# Altium PCB zulu_a7_hdi_optimized.PcbDoc (part 4 of 4)
Units mm, origin at the board's own origin, x right, y up, seen from the top; angles counter-clockwise.
Board outline 69.85 x 25.4 mm, 6 copper layers (Top Layer, L2-GND, L3-SIG, L4-SIG, L5-VCC3V3, Bottom Layer), stack 1.65 mm thick; 178 components, 177 nets, 839 pads, 1771 vias.
Unrouted connection lines stored in the file: 143.
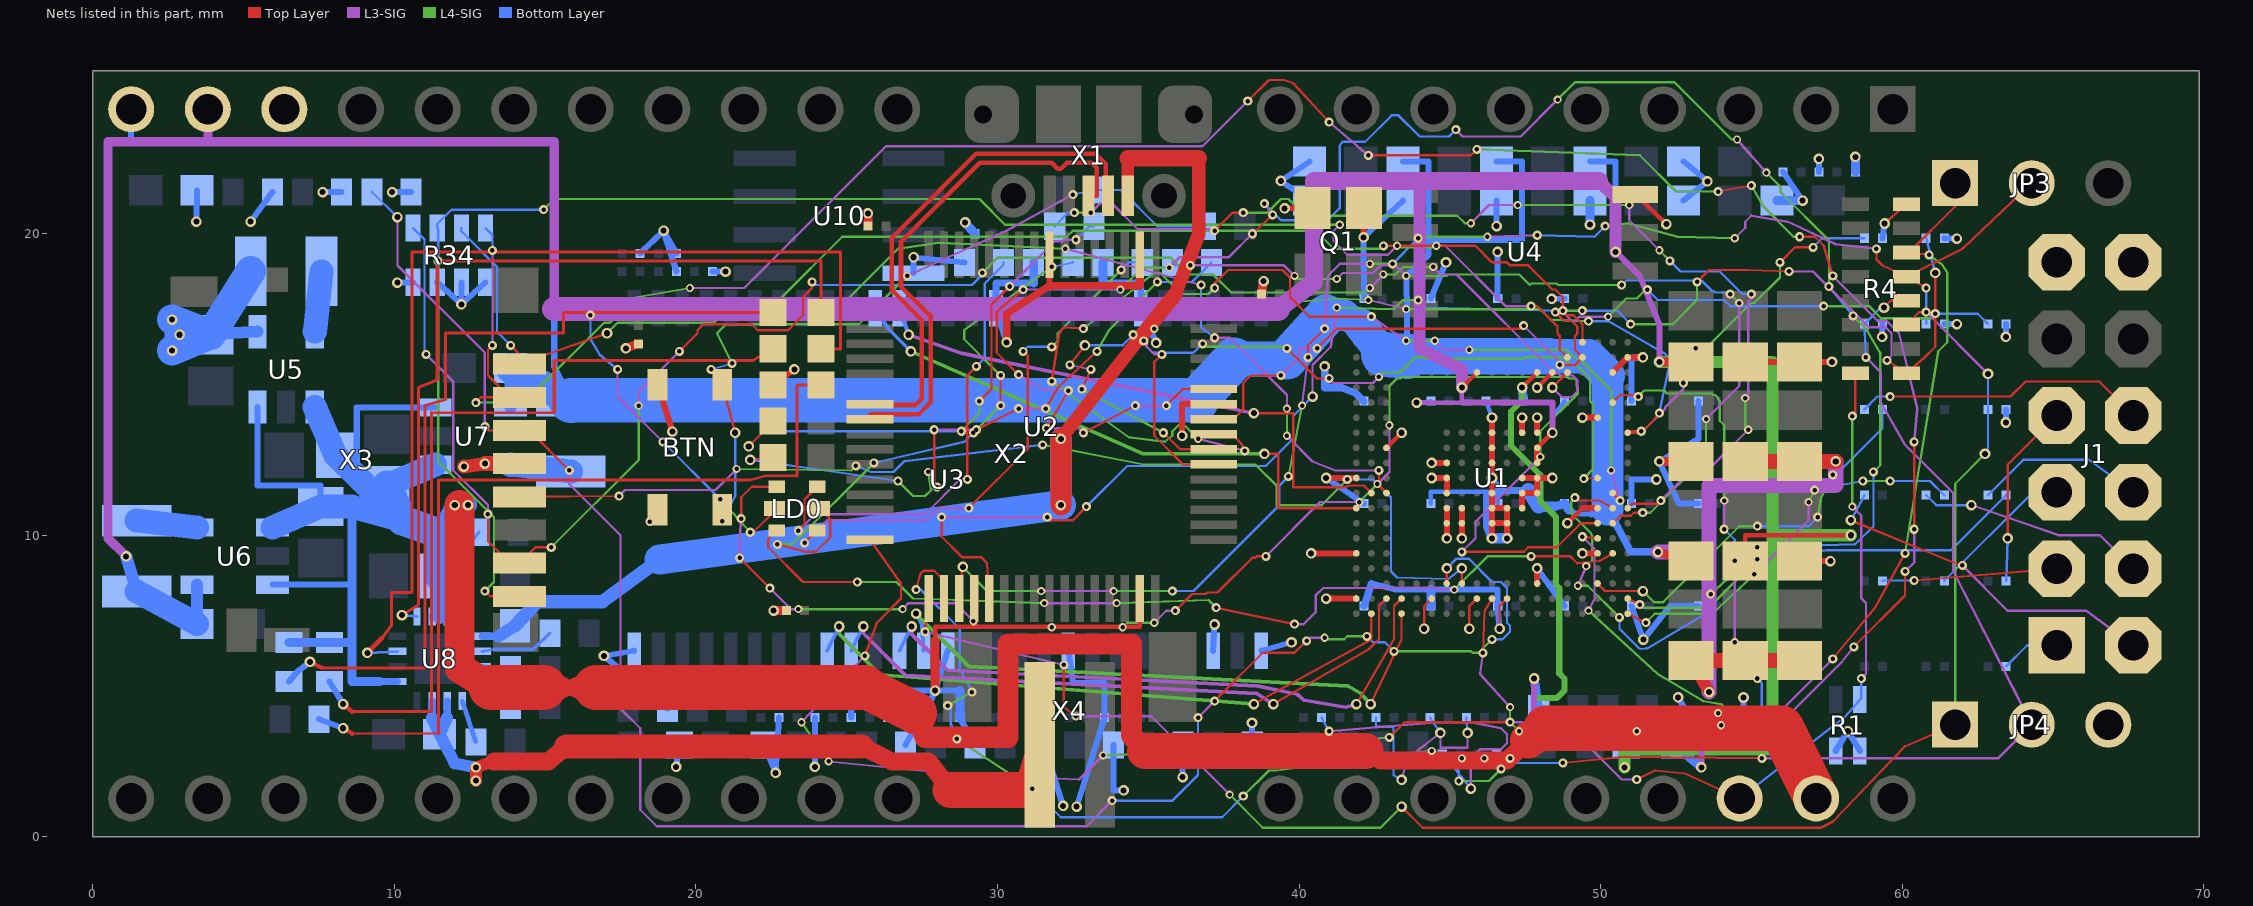
[diagram p7: the nets of this part, all layers, seen from the top]

## Via types
v1: diameter 0.35, hole 0.2, Top Layer to Bottom Layer, tented both sides, 392 vias
v2: diameter 0.27, hole 0.15, L3-SIG to L4-SIG, tented both sides, 363 vias
v3: diameter 0.3, hole 0.15, Top Layer to L2-GND, tented both sides, 292 vias
v4: diameter 0.3, hole 0.15, L2-GND to L3-SIG, tented both sides, 279 vias
v5: diameter 0.3, hole 0.15, L4-SIG to L5-VCC3V3, tented both sides, 223 vias
v6: diameter 0.3, hole 0.15, L5-VCC3V3 to Bottom Layer, tented both sides, 222 vias

## Nets (pads, with @x,y where several pads share a name; then routed paths per layer and width w, separated by ;. In a path a pad name is that pad's centre, name@x,y a point inside that pad or via, vN(x,y) a via of type N, cw(c..) or ccw(c..) an arc to the next point about the centre after c; other vN are vias at no path point) (continued)
JA8: R31.2 U1.W19 | length 13
  Top Layer w0.076: U1.W19@50.9,7.4 v3(51.5,7.1)
  L3-SIG w0.076: v2(55.1,8.7) 56.9,10.5 v2(56.9,11.1)
  L4-SIG w0.076: v3(51.5,7.1) 51.8,7.4 53.7,7.4 v2(55.1,8.7) ; v2(56.9,11.1) v5(57.1,11.5) ; v5(58.7,11.8) v5(59.6,11.8)
  Bottom Layer w0.076: v5(57.1,11.5) v5(58.7,11.8) ; v5(59.6,11.8) 60.93,11.8 R31.2@61.4,11.33
  other v2: 51.5,7.1
  other v4: 51.5,7.1
  other v6: 57.1,11.5 58.7,11.8 59.6,11.8
JA9: R32.2 U1.V19 | length 14.1
  Top Layer w0.076: U1.V19@50.9,7.9 v3(51.3,7.7)
  L4-SIG w0.076: v3(51.3,7.7) 51.4,7.6 53.6,7.6 v5(55.2,9.2)
  Bottom Layer w0.076: v5(55.2,9.2) 57.5,9.5 61.62,9.5 R32.2@63.45,11.33
  other v2: 51.3,7.7
  other v4: 51.3,7.7
  other v6: 55.2,9.2
JA10: R33.2 U1.U17 | length 13.1
  Top Layer w0.076: U1.U17@49.9,8.4 50.15,8.15 v1(51.4,8.15)
  L4-SIG w0.076: v1(51.4,8.15) 51.775,7.775 52.075,7.775 54.6,10.3 v5(55.2,10.3) ; v5(57.2,10.6) 57.3,11.2 v5(57.7,12)
  Bottom Layer w0.076: v5(55.2,10.3) 56.9,10.3 v5(57.2,10.6) ; v5(57.7,12) 57.9,12.1 59.35,13.55 R33.2@59.35,14.17
  other v6: 55.2,10.3 57.2,10.6 57.7,12
LD5_K: LD5.K R78.2 | length 28.2
  Top Layer w0.076: 8.6,3.425 11.455,3.425 ; 21.8,11.825 22.3,11.973 23.35,11.973
  Top Layer w0.1: 11.455,3.425 11.455,11.825 21.8,11.825 ; 23.35,11.973 23.35,14.985 LD5.K@24.15,14.985
  Top Layer w0.15: v1(8.3,3.6) 8.6,3.425
  Bottom Layer w0.2: R78.2@7.5,3.9 v1(8.3,3.6)
LDQM: U1.W4 U3.15 | length 20.6
  Top Layer w0.076: v1(42.375,4.4) 43.4,6.55 U1.W4@43.4,7.4
  L4-SIG w0.125: v1(27.3,7.4) 29.05,5.65 41.625,5 42.05,4.75 v1(42.375,4.4)
  Bottom Layer w0.125: v1(27.3,7.4) 27.5,7.025 U3.15@27.55,6.17
LED0_B: LD0.2 U1.N17 | length 49.6
  Top Layer w0.076: v3(21.45,9.25) v3(22.45,8.25) ; v3(21.5,10.55) 21.5,11.26 21.85,11.61 LD0.2@22.675,11.61 ; v3(35.9,7.5) 36.45,8.05 36.9,8.05 36.95,8.1 37.3,8.1 38.45,9.25 38.55,9.25 38.6,9.3 v3(38.9,9.3) ; v3(45.4,9.45) 47.45,9.45 47.6,9.6 48.55,9.6 49.35,10.4 U1.N17@49.9,10.4
  L3-SIG w0.076: v3(21.45,9.25) 21.45,9.95 v3(21.5,10.55) ; v3(22.45,8.25) 23.15,7.55 v2(23.4,7.55) ; v2(26.85,7.55) 27.05,7.75 28.6,7.75 v2(29.2,7.15) ; v2(31.8,6.95) v2(34.15,6.95) ; v2(35.2,7.1) 35.6,7.5 v3(35.9,7.5) ; v3(38.9,9.3) 40.7,11.1 v2(42,11.1) ; v2(42.6,11.7) 43,12.1 v2(43,13.65) ; v3(45.4,9.45) 45.85,9.9 45.85,10.45 v2(48,12.6)
  L4-SIG w0.076: v2(23.4,7.55) v2(26.85,7.55) ; v2(29.2,7.15) 29.4,6.95 v2(31.8,6.95) ; v2(34.15,6.95) 34.3,7.1 v2(35.2,7.1) ; v2(42,11.1) v2(42.6,11.7) ; v2(43,13.65) 43,14.95 43.25,15.2 43.35,15.2 43.4,15.25 48.9,15.25 48.95,15.2 49.15,15.2 49.2,15.15 49.2,14.95 49.25,14.9 49.25,14.7 48,13.45 v2(48,12.6)
  other v4: 35.9,7.5 22.45,8.25 21.45,9.25 38.9,9.3 45.4,9.45 21.5,10.55
LED0_G: LD0.6 U1.R18 | length 31
  Top Layer w0.076: LD0.6@22.675,10.16 22.4,9.885 22.4,9.6 23.55,8.45 v3(25.35,8.45) ; v3(37.25,7.6) v3(39.85,7.05) ; v3(47.7,9.3) 49,9.3 49.225,9.075 49.975,9.15 U1.R18@50.4,9.4
  L3-SIG w0.076: v2(31.55,7.75) v2(33.95,7.75) ; v3(39.85,7.05) 40.15,7.05 40.55,7.45 40.55,8 40.8,8.25 44.6,8.25 44.65,8.2 v2(45.15,8.2)
  L4-SIG w0.076: v3(25.35,8.45) 26.65,8.45 27.2,7.9 v2(31.55,7.75) ; v2(33.95,7.75) 37,7.85 v3(37.25,7.6) ; v2(45.15,8.2) 46.25,9.3 v3(47.7,9.3)
  other v2: 37.25,7.6 25.35,8.45 47.7,9.3
  other v4: 39.85,7.05 37.25,7.6 25.35,8.45 47.7,9.3
LED0_R: LD0.4 U1.P17 | length 87.3
  Top Layer w0.076: v3(21.8,10.1) 21.9,10.1 22.6,10.8 LD0.4@22.6,10.885 ; v3(38.3,24.4) 39,25.1 39.5,25.1 39.8,25 v3(41,23.7) ; v3(42.3,22.6) 45.7,22.6 v3(45.9,22.8) ; v3(49.4,9.95) U1.P17@49.9,9.9 ; v3(53.9,21.4) v3(55,21.6) ; v3(56.6,19.9) 57.1,19.9 57.4,19.6 v3(57.7,18.6) ; v3(58.4,6.3) 60.1,8 v3(60.1,8.8) ; v3(60.4,10.2) v3(60.4,13.1)
  L3-SIG w0.076: v2(17.4,15.5) 17.4,14.6 v2(18.9,13.1) ; v2(19.8,18.2) 21.6,18.2 26.3,22.9 36.8,22.9 v3(38.3,24.4) ; v3(41,23.7) v3(42.3,22.6) ; v3(49.4,9.95) 49.8,9.55 49.8,7.9 v2(49.6,7.5) ; v2(54,3.7) 55.9,3.7 58,5.8 v3(58.4,6.3) ; v3(57.7,18.6) 59.2,17.1 59.5,17.1 59.9,16.7 60.5,14.2 v3(60.4,13.1) ; v3(60.1,8.8) 60.4,9.1 v3(60.4,10.2)
  L4-SIG w0.076: v5(16.5,17.3) 17.5,17.8 v2(19.8,18.2) ; v5(20.8,11.2) v3(21.8,10.1) ; v3(45.9,22.8) 51.3,22.6 52.5,21.4 v3(53.9,21.4) ; v2(49.6,7.5) 51.9,5.4 53.4,4.5 54,4.4 54.2,4.2 54.2,4 v2(54,3.7) ; v3(55,21.6) 55.4,20.9 56.4,19.9 v3(56.6,19.9)
  Bottom Layer w0.076: v5(16.5,17.3) 16.5,16.5 16.8,16 v2(17.4,15.5) ; v2(18.9,13.1) v5(20.8,11.2)
  other v2: 49.4,9.95 21.8,10.1 56.6,19.9 53.9,21.4 55,21.6 45.9,22.8
  other v4: 58.4,6.3 60.1,8.8 49.4,9.95 21.8,10.1 60.4,10.2 60.4,13.1 57.7,18.6 56.6,19.9 53.9,21.4 55,21.6 42.3,22.6 45.9,22.8 41,23.7 38.3,24.4
  other v5: 18.9,13.1 17.4,15.5
  other v6: 20.8,11.2 18.9,13.1 17.4,15.5 16.5,17.3
LED1: R83.1 U1.N18 | length 29.5
  Top Layer w0.076: U1.N18@50.4,10.4 50.65,10.65 51,10.65 51.1,10.75 v3(51.4,10.75)
  L3-SIG w0.076: v2(36.4,18.95) 39.5,18.95 v2(39.85,18.6) ; v2(41.25,18.5) 41.45,18.7 42.45,18.7 42.7,18.95 43.2,18.95 v2(43.55,18.6) ; v2(53.5,13.85) 54.6,14.95 v2(54.6,17.7)
  L4-SIG w0.076: v2(39.85,18.6) 39.95,18.5 v2(41.25,18.5) ; v2(43.55,18.6) 44.9,18.6 44.95,18.65 47.3,18.65 47.65,18.3 47.7,18.35 48.55,18.35 48.6,18.3 v5(50.7,18.3) ; v3(51.4,10.75) 51.65,10.75 53.5,12.6 v2(53.5,13.85) ; v5(54.3,18) v2(54.6,17.7)
  Bottom Layer w0.076: R83.1@35.8,19.05 35.9,18.95 v2(36.4,18.95) ; v5(50.7,18.3) 50.85,18.45 53.35,18.45 53.7,18.1 53.75,18.1 53.8,18.05 54.25,18.05 v5(54.3,18)
  other v2: 51.4,10.75
  other v4: 51.4,10.75
  other v5: 36.4,18.95
  other v6: 54.3,18 50.7,18.3 36.4,18.95
LED2: R84.1 U1.M19 | length 36.1
  Top Layer w0.076: v3(37.2,20.1) 37.8,20.7 v3(38.15,20.7) ; U1.M19@50.9,10.9 51.05,11.05 52,11.05 v3(52,11.15)
  L3-SIG w0.076: v2(33.1,20.7) 33.4,21 33.8,21 34.65,20.15 37.15,20.15 v3(37.2,20.1) ; v2(45.7,20.35) 46.3,20.95 v2(47.25,20.95) ; v2(50.95,20.95) 50.95,20.45 v2(51.95,19.45) ; v3(52,11.15) 52.7,11.85 53,11.85 53.4,12.25 53.65,12.25 v2(54.9,13.5) ; v2(54.8,14.55) 54.9,14.65 54.9,17.75 55,17.85 v2(55,18)
  L4-SIG w0.076: v5(32.55,20.7) v2(33.1,20.7) ; v3(38.15,20.7) 38.95,20.7 39.4,21.15 39.65,21.15 40.2,20.6 45.25,20.6 45.5,20.35 v2(45.7,20.35) ; v2(47.25,20.95) v2(50.95,20.95) ; v2(51.95,19.45) v5(52.3,19.1) ; v2(54.8,14.55) 54.8,13.6 v2(54.9,13.5)
  Bottom Layer w0.076: R84.1@31.9,20.25 32.35,20.7 v5(32.55,20.7) ; v5(52.3,19.1) 52.65,18.75 53.95,18.75 54.7,18 v2(55,18)
  other v2: 38.15,20.7
  other v4: 52,11.15 37.2,20.1 38.15,20.7
  other v5: 55,18
  other v6: 55,18 52.3,19.1 32.55,20.7
N$BTN: BTN.3 BTN.4 R85.1 R86.2 | length 25.7
  Top Layer w0.076: v3(20.5,15.5) 20.875,14.995 v1(21.3,13.4) ; v3(20.875,10.47) BTN.3@20.875,10.845
  L3-SIG w0.076: v2(27,18.6) 30.3,20.1 v2(32.5,21.3)
  L4-SIG w0.076: v5(21.2,15.7) 20.7,16.7 21,17 25.4,17 v2(27,18.6)
  Bottom Layer w0.076: v3(20.5,15.5) v5(21.2,15.7) ; v3(20.875,10.47) 21.3,11.3 v1(21.3,13.4) ; v2(32.5,21.3) R86.2@33.2,21.45 34.1,21.45 35.3,20.25 R85.1@36.9,20.25
  other v2: 20.875,10.47 20.5,15.5
  other v4: 20.875,10.47 20.5,15.5
  other v5: 20.875,10.47 20.5,15.5 32.5,21.3
  other v6: 20.875,10.47 20.5,15.5 21.2,15.7 32.5,21.3
N$LD0B: LD0.1 R80.2 | length 15.7
  Top Layer w0.076: v3(23.4,10.15) 23.6,10.35 23.6,11.185 LD0.1@24.025,11.61 ; v3(29,11.85) 29,15.3 v3(29.3,15.6)
  L3-SIG w0.076: v3(23.4,10.15) 23.95,10.7 27.55,10.7 27.6,10.75 27.65,10.75 28.75,11.85 v3(29,11.85)
  Bottom Layer w0.076: v3(29.3,15.6) 29.575,15.875 29.575,18.35 30.2,18.975 R80.2@30.2,19.05
  other v2: 29.3,15.6
  other v4: 23.4,10.15 29,11.85 29.3,15.6
  other v5: 29.3,15.6
  other v6: 29.3,15.6
N$LD0G: LD0.5 R82.2 | length 17.9
  Top Layer w0.076: v3(23.6,9.75) LD0.5@24.025,10.16 ; v3(29.05,10.9) 31,12.85 31,15.95 v3(30.85,16.1)
  L3-SIG w0.076: v3(23.6,9.75) 24.35,10.5 27.65,10.5 28.05,10.9 v3(29.05,10.9)
  L4-SIG w0.076: v5(31.8,16.25) 32,16.45 32,16.7 v5(34.1,18.8)
  Bottom Layer w0.076: v3(30.85,16.1) 31,16.25 v5(31.8,16.25) ; v5(34.1,18.8) 34.35,19.05 R82.2@34.8,19.05
  other v2: 30.85,16.1
  other v4: 23.6,9.75 29.05,10.9 30.85,16.1
  other v5: 30.85,16.1
  other v6: 30.85,16.1 31.8,16.25 34.1,18.8
N$LD0R: LD0.3 R81.2 | length 19.5
  Top Layer w0.076: v3(22.7,9.7) 23.625,9.45 23.975,9.45 24.45,9.925 24.45,10.535 LD0.3@24.1,10.885 ; v3(30.1,14.3) v3(30.1,15.3)
  L4-SIG w0.076: v3(22.7,9.7) 23.2,9.7 v5(25.9,12.4) ; v5(29.2,13.4) v3(30.1,14.3) ; v3(30.1,15.3) 28.9,16.5 28.9,16.8 v5(31.8,18.9)
  Bottom Layer w0.076: v5(25.9,12.4) 28.9,13.1 v5(29.2,13.4) ; v5(31.8,18.9) R81.2@32.5,19.05
  other v2: 22.7,9.7 30.1,14.3 30.1,15.3
  other v4: 22.7,9.7 30.1,14.3 30.1,15.3
  other v6: 25.9,12.4 29.2,13.4 31.8,18.9
N$LD1A: LD1.A R83.2 | length 21.8
  Top Layer w0.076: v1(21.8,12.5) LD1.A@22.55,12.585 ; v3(27.9,13.5) 27.9,11.7 v3(28,11.6) ; v3(29.3,13.5) v3(30.7,14.2) ; v3(31.6,14.2) 32,14.9 v3(33.3,16.1)
  L3-SIG w0.076: v2(27.7,12.1) v3(28,11.6) ; v3(27.9,13.5) v3(29.3,13.5) ; v3(30.7,14.2) v3(31.6,14.2)
  L4-SIG w0.076: v5(26.7,11.8) 27.2,11.3 27.6,11.3 27.8,11.5 v2(27.7,12.1) ; v3(33.3,16.1) 33.7,16.8 v5(35.3,18.4)
  Bottom Layer w0.076: v1(21.8,12.5) v5(26.7,11.8) ; v5(35.3,18.4) 36.45,18.4 R83.2@37.1,19.05
  other v2: 33.3,16.1
  other v4: 28,11.6 27.9,13.5 29.3,13.5 30.7,14.2 31.6,14.2 33.3,16.1
  other v6: 26.7,11.8 35.3,18.4
N$LD2A: LD2.A R84.2 | length 17.5
  Top Layer w0.076: v1(21.75,12.95) 22.55,13.75 LD2.A@22.55,13.785 ; v3(29.4,14.45) 29.8,14.85 29.8,17.65 v3(30.4,18.25)
  L3-SIG w0.076: v3(30.4,18.25) 31.9,19.75 32.15,19.75 32.2,19.8 v2(32.6,19.8)
  L4-SIG w0.076: v5(28.8,13.45) 29.4,14.05 v3(29.4,14.45)
  Bottom Layer w0.076: v1(21.75,12.95) 22.25,13.45 v5(28.8,13.45) ; v2(32.6,19.8) 33.05,20.25 R84.2@33.2,20.25
  other v2: 29.4,14.45
  other v4: 29.4,14.45 30.4,18.25
  other v5: 32.6,19.8
  other v6: 28.8,13.45 32.6,19.8
NetL1_1: L1.1 U5.5 | length 2
  Bottom Layer w0.8: U5.5@7.358,16.752 L1.1@7.583,18.754
NetL2_1: L2.1 U6.5 | length 2
  Bottom Layer w0.8: L2.1@1.452,10.485 U6.5@3.454,10.26
NetL3_1: L3.1 U7.5 | length 2
  Bottom Layer w0.8: U7.5@13.85,12.34 L3.1@15.851,12.115
NetLD3_A: LD3.A R107.1 | length 27
  Top Layer w0.076: 11.235,14.065 15.3,14.065
  Top Layer w0.1: 8.6,4.15 11.235,4.15 11.235,14.065 ; 15.3,14.065 15.3,15.8 21.9,15.8 LD3.A@22.55,16.185
  Top Layer w0.15: v1(8.3,4.4) 8.6,4.15
  Bottom Layer w0.2: R107.1@7.85,5.15 v1(8.3,4.4)
NetLD3_K: LD3.K U8.7 | length 33.4
  Top Layer w0.1: 9.6,6.6 9.9,7 9.9,8.1 10.575,8.1 10.575,19.4 24.8,19.4 24.8,16.185 LD3.K@24.15,16.185
  Top Layer w0.15: v1(9.1,6.1) 9.6,6.6
  Bottom Layer w0.1: v1(9.1,6.1) U8.7@10.1,6.15
NetLD4_A: LD4.A R108.1 | length 28
  Top Layer w0.1: 7.6,5.6 11.015,5.6 11.015,14.3 11.7,14.5 11.7,16.7 15.6,16.7 15.6,17.385 LD4.A@22.55,17.385
  Top Layer w0.15: v1(7.2,5.8) 7.6,5.6
  Bottom Layer w0.2: R108.1@6.5,5.15 6.8,5.5 v1(7.2,5.8)
NetLD4_K: LD4.K U8.9 | length 27.4
  Top Layer w0.1: v1(10.25,7.35) 10.795,7.7 10.795,14.9 11.42,15.15 11.42,19.1 24.15,19.1 LD4.K@24.15,17.385
  Bottom Layer w0.1: v1(10.25,7.35) U8.9@10.75,7.3
NetR102_2: R102.2 U8.16 | length 1.3
  Bottom Layer w0.1: U8.16@12.9,5.15 13.35,4.9 R102.2@13.851,4.349
NetR103_2: R103.2 U8.12 | length 3
  Bottom Layer w0.1: U8.12@12.25,7.3 12.25,7.75 12.55,8.05 12.55,9.75 R103.2@12.8,10.1
NetR104_2: R104.2 U8.14 | length 2.5
  Bottom Layer w0.1: U8.14@12.9,6.15 13.3,6.22 14.6,6.22 R104.2@15.153,6.752
NetR105_2: R105.2 U8.15 | length 1
  Bottom Layer w0.15: U8.15@12.9,5.65 R105.2@13.851,5.55
NetR106_2: R106.2 U8.1 | length 1.4
  Bottom Layer w0.15: U8.1@12.25,4.5 R106.2@12.702,3.147
NODE_P0: R10.1 R11.2 R12.2 | length 14
  L3-SIG w0.076: v2(41,3.5) 44.6,3.8 45.7,3.8 46.7,3.6 46.9,3.4 46.9,3.1 46.7,2.9 46,2.9 45.7,2.6 v1(45.7,1.6)
  L4-SIG w0.076: v5(45.3,1.85) 46.3,1.85 v5(46.7,2.25)
  Bottom Layer w0.076: R12.2@40.75,3.95 v2(41,3.5) ; v5(45.3,1.85) 45.3,2.2 R10.1@44.75,2.75 v1(45.7,1.6) ; R11.2@46.55,2.75 46.7,2.6 v5(46.7,2.25)
  other v5: 41,3.5
  other v6: 45.3,1.85 46.7,2.25 41,3.5
NODE_P1: R14.1 R15.2 R16.2 | length 7.9
  L3-SIG w0.076: v1(43.4,1.89) 43.6,2.6 v1(44.69,3.45) 44.69,2.95 45.59,2.95 v1(45.59,3.45)
  Bottom Layer w0.076: R14.1@42.55,3.95 42.55,3.65 43.13,3.65 43.13,2.05 v1(43.4,1.89) ; R15.2@44.35,3.95 v1(44.69,3.45) ; R16.2@45.55,3.95 v1(45.59,3.45)
PMOD-1: J1.1 R26.2 | length 2
  Bottom Layer w0.076: R26.2@63.45,5.65 64.15,6.35 J1.1@65.13,6.35
PMOD-2: J1.2 R27.2 | length 5.8
  Top Layer w0.076: v3(60.4,8.5) J1.2@65.13,8.89
  Bottom Layer w0.076: R27.2@59.35,8.49 v3(60.4,8.5)
  other v2: 60.4,8.5
  other v4: 60.4,8.5
  other v5: 60.4,8.5
  other v6: 60.4,8.5
PMOD-3: J1.3 R28.2 | length 4.9
  Bottom Layer w0.076: R28.2@61.4,8.49 64.34,11.43 J1.3@65.13,11.43
PMOD-4: J1.4 R29.2 | length 6.2
  Top Layer w0.076: v1(63.5,9.9) 63.5,12.34 J1.4@65.13,13.97
  Bottom Layer w0.076: R29.2@63.45,8.49 v1(63.5,9.9)
PMOD-7: J1.7 R30.1 | length 11.6
  Top Layer w0.076: v1(58.3,10.5) 61.7,9.1 v3(62,9)
  L3-SIG w0.076: v3(62,9) 63.5,7.5 66.1,7.5 J1.7@67.67,6.35
  Bottom Layer w0.076: v1(58.3,10.5) R30.1@58.75,11.33
  other v4: 62,9
PMOD-8: J1.8 R31.1 | length 7.6
  L3-SIG w0.076: v1(62.3,11) 65.2,10 66.56,10 J1.8@67.67,8.89
  Bottom Layer w0.076: R31.1@60.8,11.33 61.13,11 v1(62.3,11)
PMOD-9: J1.9 R32.1 | length 5.7
  Bottom Layer w0.076: R32.1@62.85,11.33 64.02,12.5 66.2,12.5 J1.9@67.67,11.43
PMOD-10: J1.10 R33.1 | length 9.8
  Top Layer w0.076: v3(59.6,14.6) 63.6,14.6 64.1,15.1 66.54,15.1 J1.10@67.67,13.97
  Bottom Layer w0.076: R33.1@58.75,14.17 59.18,14.6 v3(59.6,14.6)
  other v2: 59.6,14.6
  other v4: 59.6,14.6
  other v5: 59.6,14.6
  other v6: 59.6,14.6
PROG#: R4.1 R99.1 U2.21 | length 48.8
  Top Layer w0.076: v3(28.15,10.6) 28.15,9.95 28.825,9.275 29.45,9.275 29.65,9.075 U2.21@29.725,7.9 ; v3(31.65,10.6) 31.75,10.5 32.5,10.5 v3(32.95,10.95) ; v3(53.2,18.4) 53.6,18.8 54.9,18.8 v3(56.25,18.75) ; v3(59.5,15.8) R4.1@60.15,15.378 60.725,15.875 61.1,16.25 v1(61.1,18.7)
  L3-SIG w0.076: v3(28.15,10.6) v3(31.65,10.6) ; v1(40.45,14.6) 40.45,15.65 41.05,16.25 v2(41.25,17.55) ; v3(56.25,18.75) 57.05,18.75 58.9,16.9 59.45,16.9 59.65,16.7 59.65,15.95 v3(59.5,15.8)
  L4-SIG w0.076: v2(41.25,17.55) 43.15,17.5 43.45,17.8 v5(43.95,17.8) ; v5(48.75,17.45) v5(49.4,17.45) ; v5(51,17) 52.4,17 53.2,17.8 v3(53.2,18.4)
  Bottom Layer w0.076: v3(32.95,10.95) 34.3,12.3 38.9,12.3 39.8,13.2 39.8,13.95 v1(40.45,14.6) ; v5(43.95,17.8) 44.15,17.55 v5(48.75,17.45) ; v5(49.4,17.45) 50.55,17.45 v5(51,17) ; R99.1@60.8,19.85 v1(61.1,18.7)
  other v2: 32.95,10.95 53.2,18.4
  other v4: 28.15,10.6 31.65,10.6 32.95,10.95 59.5,15.8 53.2,18.4 56.25,18.75
  other v5: 32.95,10.95
  other v6: 32.95,10.95 51,17 48.75,17.45 49.4,17.45 43.95,17.8
PUDC_B: R23.2 U1.E18 | length 15
  Top Layer w0.076: U1.E18@50.4,14.4 50.65,14.65 51.112,14.65 51.163,14.6 v3(51.25,14.6)
  L3-SIG w0.076: v2(54.1,10.2) v2(54.1,11.15) ; v2(54.45,6.45) v2(54.45,9.15)
  L4-SIG w0.076: v3(51.25,14.6) 51.45,14.8 52.1,14.8 52.2,14.7 53.7,14.7 53.75,14.65 53.8,14.65 53.9,14.55 53.9,14.5 53.95,14.45 53.95,13.8 54.1,13.65 v2(54.1,11.15) ; v2(54.45,6.45) 55.2,5.7 v5(55.2,5.25)
  Bottom Layer w0.076: v2(54.1,10.2) 54.45,9.85 v2(54.45,9.15) ; v5(55.2,5.25) 55.35,5.1 R23.2@55.35,3.95
  other v2: 51.25,14.6
  other v4: 51.25,14.6
  other v5: 54.45,9.15 54.1,10.2
  other v6: 55.2,5.25 54.45,9.15 54.1,10.2
RAS#: U1.V3 U3.18 | length 21
  Top Layer w0.076: v1(39.15,4.4) 42.325,6.225 42.65,6.55 42.65,7.187 42.65,7.65 U1.V3@42.9,7.9
  L3-SIG w0.125: v1(25.55,6.975) 25.55,6.75 26.95,5.35 38.6,4.75 v1(39.15,4.4)
  Bottom Layer w0.125: U3.18@25.15,6.17 v1(25.55,6.975)
RST#: R1.2 R4.16 U1.V10 X2.23 | length 29.6
  Top Layer w0.076: v3(46.1,6.1) 46.15,7.475 U1.V10@46.4,7.9 ; v3(51.2,1.9) 51.8,2.2 52.8,2.1 X2.23@54.61,1.27 ; v3(58.35,13.95) 58.45,14.05 R4.16@58.45,15.378
  L3-SIG w0.076: v3(46.1,6.1) 46,5.4 v2(47,4.3) ; v2(47.3,3.5) 47.6,3.1 47.7,3 49.6,3 50.7,1.9 v3(51.2,1.9) ; v2(58.35,10.95) 58.65,10.65 58.65,7.9 58.8,7.75 58.8,5.4 v2(58.65,5.25)
  L4-SIG w0.076: v2(47,4.3) 47,3.8 v2(47.3,3.5) ; v2(58.35,10.95) v3(58.35,13.95)
  Bottom Layer w0.076: X2.23@54.61,1.27 58.1,3.975 R1.2@58.6,4.55 58.65,4.6 v2(58.65,5.25)
  other v2: 58.35,13.95
  other v4: 51.2,1.9 46.1,6.1 58.35,13.95
  other v5: 58.65,5.25
  other v6: 58.65,5.25
SD-CLK: U1.U8 X3.5 | length 36.7
  Top Layer w0.076: X3.5@14.15,11.275 v3(17.45,11.3) ; U1.U8@45.4,8.4 v1(45.4,8.9)
  L3-SIG w0.076: v3(17.45,11.3) 17.65,11.5 20.65,11.5 v2(21.35,12.2)
  L4-SIG w0.076: v2(21.35,12.2) 25.15,12.15 v5(25.3,12.3) ; v5(31.5,13) 34.85,12.35 38.55,12.35 39.25,11.65 39.25,11 40.75,11 v5(41.6,11.85)
  Bottom Layer w0.076: v5(25.3,12.3) 25.8,12.1 26.55,12.1 26.9,12.45 v5(31.5,13) ; v5(41.6,11.85) 42.45,11.85 43.05,11.25 43.05,8.8 43.25,8.6 44.95,8.55 v1(45.4,8.9)
  other v4: 17.45,11.3
  other v6: 41.6,11.85 25.3,12.3 31.5,13
SD-CMD: R35.1 U1.U7 X3.3 | length 62.9
  Top Layer w0.076: v3(13,13.6) 13.125,13.475 X3.3@14.15,13.475 14.475,13.475 v3(15.8,12.15) ; v3(37.2,4.5) 38.8,6.1 39.85,6.1 v3(40.25,6.5) ; U1.U7@44.9,8.4 v1(44.9,8.9)
  L3-SIG w0.076: v1(10.1,20.55) 10.1,18.95 13,16.05 v3(13,13.6) ; v3(15.8,12.15) 15.8,11.7 17.5,10 17.5,4.25 18.15,3.6 18.15,0.9 18.7,0.35 32.95,0.35 v2(33.8,1.2) ; v2(36.65,3.95) v3(37.2,4.5) ; v3(40.25,6.5) 40.35,6.6 v2(40.85,6.6)
  L4-SIG w0.076: v2(40.85,6.6) 40.9,6.55 41.5,6.55 41.6,6.65 v5(42.25,6.65) ; v5(43.15,6.15) 45.7,6.15 45.75,6.1 45.95,6.1 v5(46.4,6.55)
  Bottom Layer w0.076: R35.1@9.25,21.39 v1(10.1,20.55) ; v2(33.8,1.2) 35.8,1.2 36.65,2.05 v2(36.65,3.95) ; v5(42.25,6.65) 42.45,6.45 42.85,6.45 v5(43.15,6.15) ; v1(44.9,8.9) 45.225,9.225 45.625,9.225 46.4,8.45 46.7,8.45 46.9,8.25 46.9,7.1 47,7 47,6.8 46.75,6.55 v5(46.4,6.55)
  other v4: 37.2,4.5 40.25,6.5 15.8,12.15 13,13.6
  other v5: 33.8,1.2 36.65,3.95
  other v6: 33.8,1.2 36.65,3.95 43.15,6.15 46.4,6.55 42.25,6.65
SD-DAT0: R34.1 U1.C15 X3.7 | length 58.7
  Top Layer w0.076: v3(13.1,10.7) 13.1,9.8 13.825,9.075 X3.7@14.15,9.075 14.675,9.6 v3(15.2,9.6) ; v3(19.45,16.1) 20.05,16.7 20.05,16.8 20.25,17 21.85,17 22.05,16.8 23.05,16.8 23.55,17.3 23.55,17.9 23.85,18.2 v3(23.85,18.4) ; v1(48.4,14.9) U1.C15@48.9,15.4
  L3-SIG w0.076: v2(11.05,16) 11.95,15.1 11.95,12.15 13.1,11 v3(13.1,10.7) ; v2(18.1,14.3) 18.1,14.75 v3(19.45,16.1) ; v2(42.35,18.2) v2(42.8,18.65) ; v2(44.45,18.9) 44.7,18.65 45.225,18.65 48.5,15.375 48.6,15.375 48.675,15.3 49.075,15.3 49.225,15.15 49.225,14.775 49.025,14.575 48.725,14.575 v1(48.4,14.9)
  L4-SIG w0.076: v3(15.2,9.6) 18.1,12.5 v2(18.1,14.3) ; v5(29.5,18.7) 30,19.2 35.75,19.2 36.3,18.65 37.15,18.65 37.75,18.05 42.2,18.05 v2(42.35,18.2) ; v2(42.8,18.65) 43.2,18.65 43.45,18.9 v2(44.45,18.9)
  Bottom Layer w0.076: R34.1@10.62,20.19 11,19.81 11,16.05 v2(11.05,16) ; v3(23.85,18.4) 23.95,18.3 29.15,18.3 29.5,18.65 v5(29.5,18.7)
  other v2: 15.2,9.6 23.85,18.4
  other v4: 15.2,9.6 13.1,10.7 19.45,16.1 23.85,18.4
  other v5: 11.05,16 23.85,18.4
  other v6: 11.05,16 23.85,18.4 29.5,18.7
SD-DAT1: R34.2 U1.B15 X3.8 | length 55.6
  Top Layer w0.076: v3(13,8.15) 13.175,7.975 X3.8@14.15,7.975 ; v3(47.7,17.6) 47.9,17.6 48.575,16.925 48.575,16.688 48.65,16.612 48.65,16.15 U1.B15@48.9,15.9
  L3-SIG w0.076: v2(41.35,20.3) 41.15,20.1 41.15,19.75 41.6,19.3 42.95,19.3 v2(43.25,19.6) ; v2(44.55,19.6) 44.85,19.6 46.85,17.6 v3(47.7,17.6)
  L4-SIG w0.076: v5(11.45,19.1) 11.45,12.45 13.3,10.6 13.3,8.45 v3(13,8.15) ; v5(14.95,20.8) 15.3,21.15 29.4,21.15 30.25,20.3 v2(41.35,20.3) ; v2(43.25,19.6) 43.3,19.55 44.5,19.55 v2(44.55,19.6)
  Bottom Layer w0.076: v5(11.45,19.1) 11.45,20.16 R34.2@11.42,20.19 11.42,20.32 11.9,20.8 v5(14.95,20.8)
  other v2: 13,8.15
  other v4: 13,8.15 47.7,17.6
  other v6: 11.45,19.1 14.95,20.8
SD-DAT2: R34.3 U1.L3 X3.1 | length 40.2
  Top Layer w0.076: v3(13.85,16.3) 14.15,16 X3.1@14.15,15.675 v1(17.05,16.7) ; v3(42.65,12.15) 42.65,11.65 U1.L3@42.9,11.4
  L3-SIG w0.076: v2(32.25,19.5) v2(36.75,18.3) ; v2(37.2,16.55) 37.7,16.55 39.6,14.65 v2(39.6,14.2) ; v2(39.6,13.3) 40.45,12.45 41.2,12.15 v3(42.65,12.15)
  L4-SIG w0.076: v1(17.05,16.7) 17.4,17.05 20.6,17.05 20.95,17.4 24.6,17.4 26.7,19.5 28.05,19.7 v2(32.25,19.5) ; v2(39.6,13.3) v2(39.6,14.2)
  Bottom Layer w0.076: R34.3@12.22,20.19 12.22,20.08 13.4,18.9 13.4,16.75 v3(13.85,16.3) ; v2(36.75,18.3) 36.75,16.9 36.8,16.85 v2(37.2,16.55)
  other v2: 13.85,16.3
  other v4: 42.65,12.15 13.85,16.3
  other v5: 13.85,16.3 37.2,16.55 36.75,18.3
  other v6: 13.85,16.3 37.2,16.55 36.75,18.3
SD-DAT3: R34.4 U1.A16 X3.2 | length 48.9
  Top Layer w0.076: v3(12.7,14.4) 12.875,14.575 X3.2@13.825,14.575 ; v3(13.25,16.3) 13.1,16.15 13.1,15.3 X3.2@13.825,14.575 ; X3.2@14.15,14.575 X3.2@13.825,14.575 ; v3(42.8,19.6) 45.85,19.6 46.4,19.05 46.9,19.05 47,18.95 47.6,18.95 48.4,18.15 48.5,18.15 48.75,17.9 48.75,17.525 48.8,17.475 48.8,17.375 48.875,17.3 49.1,17.3 49.4,17 U1.A16@49.4,16.4
  L3-SIG w0.076: v3(13.25,16.3) v2(13.25,19.45)
  L4-SIG w0.076: v3(12.7,14.4) 14.3,14.4 16.95,17.05 17.15,17.05 17.4,17.3 20.1,17.3 20.65,17.85 22.8,17.85 24.85,19.9 32.3,19.9 32.5,20.1 40.55,20.1 41.15,19.5 42.7,19.5 v3(42.8,19.6)
  Bottom Layer w0.076: R34.4@13.02,20.19 13.25,19.96 v2(13.25,19.45)
  other v2: 12.7,14.4 42.8,19.6
  other v4: 12.7,14.4 13.25,16.3 42.8,19.6
  other v5: 13.25,19.45
  other v6: 13.25,19.45
SDRAM-CLK: U1.M1 U3.38 | length 19.2
  Top Layer w0.076: v1(38.85,12.7) 39.312,12.7 39.312,10.9 40.9,10.9 41.5,10.9 U1.M1@41.9,10.9
  L4-SIG w0.125: v1(27.125,16.1) 34.825,12.7 v1(38.85,12.7)
  Bottom Layer w0.125: U3.38@25.95,17.53 26.375,16.85 v1(27.125,16.1)
SDRAM-CS#: U1.W2 U3.19 | length 20.8
  Top Layer w0.076: v1(38.5,4.4) 42.4,6.55 U1.W2@42.4,7.4
  L4-SIG w0.125: v1(24.75,6.975) 24.75,6.725 26.1,5.375 v1(38.5,4.4)
  Bottom Layer w0.125: U3.19@24.35,6.17 v1(24.75,6.975)
TCK: JP3.1 R4.6 U2.16 | length 62.8
  Top Layer w0.076: v3(25.6,6) 26,7.1 26.8,7.9 26.8,8.4 U2.16@25.775,9.85 ; v3(43,3.3) 43.5,3.8 v3(47,3.8) ; v3(57.7,5.9) 59.1,7.6 v3(60.1,9.4) ; v3(60.9,19.3) R4.6@60.15,19.378 60.228,19.378 61.76,20.91 JP3.1@61.76,21.68
  L3-SIG w0.076: v2(23.5,3.8) v3(25.6,6) ; v2(24.4,2.5) 28.4,2.1 32.7,1.9 v2(33.5,2.7) ; v3(47,3.8) 47.4,3.8 47.6,3.6 47.7,3.3 47.8,3.2 50,3.2 50.4,3.6 v2(51.2,3.5) ; v2(53.9,4.1) 55.9,4.1 v3(57.7,5.9)
  L4-SIG w0.076: v2(23.5,3.8) v2(24.4,2.5) ; v2(33.5,2.7) 39.2,2.9 v3(43,3.3) ; v2(51.2,3.5) v2(53.9,4.1) ; v3(60.1,9.4) 61.2,16.1 61.5,16.4 61.5,18.7 61.3,19 v3(60.9,19.3)
  other v2: 43,3.3 60.1,9.4 60.9,19.3
  other v4: 43,3.3 47,3.8 57.7,5.9 25.6,6 60.1,9.4 60.9,19.3
TDI: JP4.1 R4.3 R90.1 U2.17 | length 56.1
  Top Layer w0.076: v3(27.6,6.8) U2.17@27.725,7.9 ; v3(32.2,5.7) 32.2,4.3 v3(32.6,4) ; v1(43.4,1) 44.1,0.3 57.3,0.3 57.7,0.5 60.1,3 JP4.1@61.76,3.72 ; R4.3@60.15,16.978 60.572,17.4 v3(60.8,17.4)
  L3-SIG w0.076: v3(27.6,6.8) v3(32.2,5.7) ; v3(32.6,4) 35.1,4 v2(37.7,1.4) ; v3(60.8,17.4) v1(62.85,15.35)
  L4-SIG w0.076: v2(37.7,1.4) 38.8,0.3 42.7,0.3 v1(43.4,1) ; JP4.1@61.76,3.72 61.76,11.71 v1(62.75,12.7)
  Bottom Layer w0.076: v1(62.75,12.7) 62.85,12.8 R90.1@62.85,14.17 v1(62.85,15.35)
  other v4: 32.6,4 32.2,5.7 27.6,6.8 60.8,17.4
TDO: JP4.2 R4.4 R91.1 U2.18 | length 62.9
  Top Layer w0.076: v3(27.3,8.2) 27.45,8.725 27.55,8.825 27.9,8.825 28.225,8.5 U2.18@28.225,7.9 ; v3(48.75,2.45) 50.8,2.65 v3(55.35,2.6) ; v1(59.4,17.55) 59.628,17.778 R4.4@60.15,17.778
  L3-SIG w0.076: v2(44.4,2.85) v2(45.4,2.6) ; v2(46.15,2.6) v2(47,2.6) ; v3(55.35,2.6) 63.18,2.6 JP4.2@64.3,3.72 61.7,8.8 61.7,11.4 60.1,13 59.3,14.4 59.3,15.4 v2(58.8,15.9)
  L4-SIG w0.076: v5(28.35,4.35) v5(29.15,4.8) ; v5(28.65,3.25) v5(31.15,1.6) ; v5(38.15,1.35) 39,2.2 39.25,2.2 v2(44.4,2.85) ; v2(45.4,2.6) v2(46.15,2.6)
  Bottom Layer w0.076: v3(27.3,8.2) 27.45,8.2 28.75,6.9 28.75,5.55 v5(29.15,4.8) ; v5(28.35,4.35) 28.45,4.25 28.45,3.75 v5(28.65,3.25) ; v5(31.15,1.6) 32.1,0.65 37.45,0.65 v5(38.15,1.35) ; v2(47,2.6) 47.15,2.45 v3(48.75,2.45) ; v2(58.8,15.9) R91.1@58.75,17.01 59.29,17.55 v1(59.4,17.55)
  other v2: 48.75,2.45 27.3,8.2
  other v4: 48.75,2.45 55.35,2.6 27.3,8.2
  other v5: 48.75,2.45 47,2.6 27.3,8.2 58.8,15.9
  other v6: 38.15,1.35 31.15,1.6 48.75,2.45 47,2.6 28.65,3.25 28.35,4.35 29.15,4.8 27.3,8.2 58.8,15.9
TMS: JP3.2 R4.5 R92.1 U2.19 | length 49.3
  Top Layer w0.076: U2.19@28.725,7.9 v1(28.85,8.95) ; v3(40.3,15.9) 40.3,16.3 v3(40.85,16.85) ; v3(59.15,19.5) 59.15,19.15 59.35,18.95 R4.5@60.15,18.578 ; v3(60.8,18.2) R4.5@60.15,18.578 ; JP3.2@64.3,21.68 62,19.5 R4.5@60.15,18.578
  L3-SIG w0.076: v2(31.45,8.15) v2(33.85,8.15) ; v2(40.1,14.3) v3(40.3,15.9) ; v3(40.85,16.85) 40.95,18.55 41.1,18.75 41.35,19 v2(42.35,19) ; v2(46.25,19.9) v2(47.9,19.95) ; v2(54.45,19.85) 54.8,20.2 54.8,20.4 55,20.6 56.2,20.4 57.8,19.65 v3(59.15,19.5)
  L4-SIG w0.076: v1(28.85,8.95) 29.65,8.15 v2(31.45,8.15) ; v2(33.85,8.15) v5(35.8,8.15) ; v5(39.65,11.95) v2(40.1,14.3) ; v2(42.35,19) v5(43.1,19) ; v5(43.95,19.85) 44,19.9 v2(46.25,19.9) ; v5(50.15,20.25) 50.9,20.35 52.55,19.9 v2(54.45,19.85)
  Bottom Layer w0.076: v5(35.8,8.15) 36.5,8.15 39.35,11 39.35,11.65 v5(39.65,11.95) ; v5(43.1,19) v5(43.95,19.85) ; v2(47.9,19.95) 49.8,19.9 v5(50.15,20.25) ; R92.1@60.8,17.01 v3(60.8,18.2)
  other v2: 60.8,18.2
  other v4: 40.3,15.9 40.85,16.85 60.8,18.2 59.15,19.5
  other v5: 60.8,18.2 47.9,19.95
  other v6: 35.8,8.15 39.65,11.95 60.8,18.2 43.1,19 43.95,19.85 47.9,19.95 50.15,20.25
UART_FT_CTS#: R93.1 U1.B16 U2.41 | length 32.5
  Top Layer w0.076: U2.41@37.175,13.85 37.825,13.85 38.15,14.175 38.15,15.05 38.4,15.3 v3(39.4,15.3) ; v3(40.6,16.2) 41.25,16.85 47.35,16.85 v3(47.45,16.95) ; v3(48.5,17.4) 48.775,17.125 49.025,17.125 49.1,17.05 49.225,16.925 49.225,16.687 49.15,16.612 49.15,16.15 U1.B16@49.4,15.9 49.15,15.65 v3(48.65,15.65)
  L3-SIG w0.076: v3(39.4,15.3) 40,15.9 40,16.2 v3(40.6,16.2) ; v3(47.45,16.95) 48.65,15.75 v3(48.65,15.65) ; v3(48.5,17.4) 48.75,17.4 49.1,17.05 49.3,17.25 v2(50.25,17.25)
  L4-SIG w0.076: v2(50.25,17.25) 50.85,17.85 51.2,17.85 51.5,18.15 v5(51.55,18.15) ; v5(57.4,17.6) 58.9,17.6 59.3,17.2 60.95,17.2 v5(61.1,17.35)
  Bottom Layer w0.076: v5(51.55,18.15) 51.9,17.8 54.1,17.8 54.3,17.6 v5(57.4,17.6) ; v5(61.1,17.35) 62.51,17.35 R93.1@62.85,17.01
  other v4: 39.4,15.3 48.65,15.65 40.6,16.2 47.45,16.95 48.5,17.4
  other v6: 61.1,17.35 57.4,17.6 51.55,18.15
UART_FT_DTR#: U1.M18 U2.43 | length 75.3
  Top Layer w0.076: v3(30.7,15.325) 29.975,16.05 29.975,17.4 30.15,17.575 v3(30.85,18.15) ; v3(31.625,13.55) v3(32.35,14.8) ; v3(32.85,13.4) v3(34.575,14.3) ; v3(35.6,14.3) 36.15,14.85 U2.43@37.175,14.85 ; v3(38.45,20) v3(39.125,20.625) ; v3(49.15,11.25) 49.25,11.15 49.975,11.15 U1.M18@50.4,10.9
  L3-SIG w0.076: v3(30.7,15.325) 31.525,14.825 v3(32.35,14.8) ; v3(30.85,18.15) v2(34.075,18.15) ; v3(31.625,13.55) 32.7,13.55 v3(32.85,13.4) ; v3(34.575,14.3) v3(35.6,14.3) ; v2(35.7,18.875) 36.05,19.225 37.675,19.225 v3(38.45,20) ; v2(38.85,21) v3(39.125,20.625) ; v2(45.2,23.45) 45.425,23.225 47.35,23.225 v2(48.575,24.45) ; v2(49.25,8.325) v2(49.525,8.975) ; v2(54.525,23.125) v2(55.5,22.025)
  L4-SIG w0.076: v2(34.075,18.15) 34.8,18.875 v2(35.7,18.875) ; v2(48.575,24.45) 49.15,25.025 52.45,25.025 54.35,23.125 v2(54.525,23.125) ; v3(49.15,11.25) 49.025,11.125 49.025,10.725 49.675,10.075 49.725,9.975 49.725,9.175 v2(49.525,8.975) ; v2(49.25,8.325) 49.575,8.325 v5(50.625,7.275) ; v5(53.65,8.05) 54.7,9 54.75,9.15 v5(55.2,9.6) ; v2(55.5,22.025) 55.975,21.55 55.975,21.375 57.575,19.775 v5(57.575,18.25) ; v5(58.375,17.275) 58.8,16.85 59.275,16.05 59.275,12.325 v5(59.05,12.1)
  Bottom Layer w0.076: v2(38.85,21) 39.4,20.45 40.95,20.45 41.35,20.85 41.35,22.925 41.425,23.025 41.45,23.05 42.2,23.05 43.075,23.925 43.3,23.925 44,23.225 44.975,23.225 v2(45.2,23.45) ; v5(50.625,7.275) 50.625,6.9 51.275,6.25 51.35,6.225 51.55,6.25 53.525,7.425 53.55,7.95 v5(53.65,8.05) ; v5(55.2,9.6) 58.425,9.7 58.55,9.8 59.05,10.3 v5(59.05,12.1) ; v5(57.575,18.25) v5(58.375,17.275)
  other v2: 49.15,11.25
  other v4: 49.15,11.25 32.85,13.4 31.625,13.55 34.575,14.3 35.6,14.3 32.35,14.8 30.7,15.325 30.85,18.15 38.45,20 39.125,20.625
  other v5: 38.85,21 45.2,23.45
  other v6: 50.625,7.275 53.65,8.05 55.2,9.6 59.05,12.1 58.375,17.275 57.575,18.25 38.85,21 45.2,23.45
UART_FT_RTS#: U1.L18 U2.40 | length 36.2
  Top Layer w0.076: v3(31.8,15.1) 32.05,16.7 32.15,16.85 32.25,16.9 v3(32.85,16.85) ; U2.40@37.175,13.35 37.775,13.35 38.075,13.05 v3(38.2,12.8) ; v3(37.2,18.2) 37.2,18.35 37.65,18.8 39.45,18.8 39.7,18.55 39.7,17.9 40.35,17.25 v3(42.4,17.25) ; U1.L18@50.4,11.4 v3(50.65,11.15)
  L3-SIG w0.076: v2(36.65,13.2) v3(38.2,12.8) ; v3(42.4,17.25) v2(43.55,16.45) ; v2(44.5,16.45) 44.75,16.2 44.85,16.15 v2(45.65,16.15) ; v2(50.35,12.15) v3(50.65,11.15)
  L4-SIG w0.076: v3(31.8,15.1) 34.35,13.25 35.55,13.1 35.8,13.3 35.8,13.45 36,13.65 36.2,13.65 v2(36.65,13.2) ; v3(32.85,16.85) 35.2,18.7 35.4,18.7 36.1,18 37,18 v3(37.2,18.2) ; v2(43.55,16.45) v2(44.5,16.45) ; v2(45.65,16.15) 48.85,16.15 48.95,16.05 49.4,15.75 50.35,14.8 v2(50.35,12.15)
  other v2: 31.8,15.1 32.85,16.85 37.2,18.2
  other v4: 50.65,11.15 38.2,12.8 31.8,15.1 32.85,16.85 42.4,17.25 37.2,18.2
UART_FT_RXD: R94.1 U1.G19 U2.39 | length 42.2
  Top Layer w0.076: v3(32.4,15.65) v1(32.9,16.3) ; v3(32.8,14.85) v3(33.1,15.5) ; v3(35.5,13.4) 36.05,12.85 U2.39@37.175,12.85 ; v3(51.35,13.45) 50.95,13.45 U1.G19@50.9,13.4 51.35,13.4 51.65,13.7 v3(51.95,14.05) ; v3(55.95,19.05) 56.45,19.55 v3(57.05,19.55)
  L3-SIG w0.076: v3(32.4,15.65) v3(33.1,15.5) ; v2(42.3,17.8) v2(43.55,17.5) ; v3(51.35,13.45) 51.4,13.45 52.15,14.2 52.15,14.25 52.75,14.85 v2(52.75,15.05)
  L4-SIG w0.076: v3(32.8,14.85) v3(35.5,13.4) ; v5(34.5,16.65) 35.35,17.5 36.75,17.5 41.3,17.85 v2(42.3,17.8) ; v2(43.55,17.5) 48,17.5 48.35,17.15 v5(49.6,17.1) ; v5(53.15,16.2) 53.5,16.2 55,17.7 55.1,17.7 55.95,18.55 v3(55.95,19.05)
  Bottom Layer w0.076: v1(32.9,16.3) 34.15,16.3 v5(34.5,16.65) ; v5(49.6,17.1) 50.25,17.1 52.1,16.05 52.3,15.85 52.3,15.75 v3(51.95,14.05) ; v2(52.75,15.05) 53.15,15.45 v5(53.15,16.2) ; v3(57.05,19.55) 57.35,19.85 R94.1@58.75,19.85
  other v2: 35.5,13.4 51.95,14.05 32.8,14.85 55.95,19.05 57.05,19.55
  other v4: 35.5,13.4 51.35,13.45 51.95,14.05 32.8,14.85 33.1,15.5 32.4,15.65 55.95,19.05 57.05,19.55
  other v5: 51.95,14.05 52.75,15.05 57.05,19.55
  other v6: 51.95,14.05 52.75,15.05 53.15,16.2 34.5,16.65 49.6,17.1 57.05,19.55
UART_FT_TXD: U1.K17 U2.38 | length 27.3
  Top Layer w0.076: v3(35.45,16) 35.2,15.75 35.2,13.3 36.15,12.35 U2.38@37.175,12.35 ; v3(39.6,16.2) 40.6,15.2 v3(41,15.2) ; v3(49.45,11.88) U1.K17@49.9,11.9
  L3-SIG w0.076: v2(35.2,16.85) 34.95,16.6 34.95,16.25 35.2,16 v3(35.45,16) ; v3(41,15.2) 41.15,15.05 42.45,15.05 v2(42.65,15.25)
  L4-SIG w0.076: v5(34.85,16.45) 35.2,16.8 v2(35.2,16.85) ; v5(36.8,16.35) 36.9,16.25 39.55,16.25 v3(39.6,16.2) ; v2(42.65,15.25) 42.8,15.4 43.3,15.4 43.35,15.45 43.4,15.45 43.85,15.9 44.15,15.9 44.2,15.85 47.45,15.85 47.5,15.9 48.75,15.9 49,15.65 49.2,15.65 49.65,15.2 49.65,14.45 49.75,14.35 49.75,12.2 v3(49.45,11.88)
  Bottom Layer w0.076: v5(34.85,16.45) 34.95,16.35 34.95,16.25 35.15,16.05 36.5,16.05 v5(36.8,16.35)
  other v2: 49.45,11.88 39.6,16.2
  other v4: 49.45,11.88 41,15.2 35.45,16 39.6,16.2
  other v6: 36.8,16.35 34.85,16.45
UDQM: U1.L2 U3.39 | length 19.2
  Top Layer w0.076: v1(38.5,14.05) 39.812,14.05 39.812,11.59 40.9,11.59 41.5,11.59 41.688,11.65 42.15,11.65 U1.L2@42.4,11.4
  L3-SIG w0.125: v1(27.05,16.65) 28.85,16.025 v1(38.5,14.05)
  Bottom Layer w0.125: U3.39@26.75,17.53 v1(27.05,16.65)
USB5V0: C150.2 U8.13 X1.1 | length 39
  Top Layer w0.4: X1.1@34.32,21.259 34.32,22.5
  Top Layer w0.45: v1(32.1,13.2) 34.8,16.65 ; 35.9,18 36.68,20 36.68,22.5
  Top Layer w0.5: 34.8,16.65 35.9,18
  Top Layer w0.55: 34.32,22.5 36.68,22.5
  Top Layer w0.7: v1(32.1,11) v1(32.1,13.2)
  Bottom Layer w0.24: U8.13@12.9,6.65 13.45,6.65
  Bottom Layer w0.4: 13.45,6.65 C150.2@14.002,7
  Bottom Layer w0.45: C150.2@14.002,7 14.75,7.8 16.9,7.8 18.8,9.2
  Bottom Layer w0.7: v1(32.1,11) v1(32.1,13.2)
  Bottom Layer w1: 18.8,9.2 v1(32.1,11)
USB_D_N: U2.7 X1.2 | length 17.1
  Top Layer w0.15: U2.7@25.775,14.35 25.775,14.32 27.27,14.32 27.483,14.532 27.483,17.138 26.5,18.12 26.5,19.862 29.288,22.65 33.252,22.65 33.59,22.312 33.59,21.258 X1.2@33.67,21.258
USB_D_P: U2.8 X1.3 | length 17.1
  Top Layer w0.15: U2.8@25.775,13.85 25.775,14.02 27.395,14.02 27.782,14.408 27.782,17.262 26.8,18.245 26.8,19.738 29.412,22.35 31.8,22.35 32.002,22.148 32.102,22.148 32.304,22.35 33.128,22.35 33.29,22.188 33.29,21.258 X1.3@33.02,21.258
VBATT: C151.2 U8.2 U8.3 X4.1 | length 25.6
  Top Layer w0.4: v1(12.7,1.86) v1(12.7,2.3) 13.3,2.5
  Top Layer w0.6: 13.3,2.5 15.1,2.5 15.7,3 ; 25.5,3 26.5,2.5 27.7,2.5 28.45,1.55
  Top Layer w0.8: 15.7,3 25.5,3 ; X4.1@30.95,1.55 X4.1@31.4,3.05
  Top Layer w1.2: 28.45,1.55 X4.1@30.95,1.55
  Bottom Layer w0.24: 11.25,3.949 U8.3@11.25,4.5 ; 11.75,3.949 U8.2@11.75,4.5
  Bottom Layer w0.4: 11.25,3.949 C151.2@11.5,3.398 ; 11.75,3.949 C151.2@11.5,3.398 ; v1(12.7,1.86) v1(12.7,2.3) 12,2.44 C151.2@11.5,3.398
VCC1V0: C84.2 C85.1 C86.1 C87.1 C88.1 C89.1 C90.1 C91.1 C92.1 C140.1 C141.1 C142.1 C143.1 L3.2 U1.G10 U1.H10 U1.J10 U1.L10 U1.M10 U1.M11 U1.N10 U1.N11 U7.4 X2.20 | length 127.5
  Top Layer w0.2: v1(46.4,9.9) U1.N10@46.4,10.4 ; v1(46.4,13.9) U1.G10@46.4,13.4 U1.H10@46.4,12.9 U1.J10@46.4,12.4 v1(46.4,11.9) U1.L10@46.4,11.4 U1.M10@46.4,10.9 ; v1(46.9,9.9) U1.N11@46.9,10.4 ; U1.N10@46.4,10.4 U1.N11@46.9,10.4 ; U1.N10@46.4,10.4 U1.M10@46.4,10.9 ; U1.M10@46.4,10.9 U1.M11@46.9,10.9 U1.N11@46.9,10.4
  Top Layer w0.3: v1(51.9,9.445) C143.1@53,9.15
  Top Layer w0.4: C140.1@53,5.85 v1(53.6,4.8)
  Top Layer w0.5: C140.1@53,5.85 C141.1@54.8,5.85 C142.1@56.6,5.85 ; C85.1@54.8,12.45 C86.1@56.6,12.45 v1(57.8,12.45)
  L3-SIG w0.5: v1(51.9,9.445) 53.6,9.445 ; v1(53.6,4.8) 53.6,9.445 ; v1(57.8,12.45) 57.8,11.65 53.6,11.65 53.6,9.445
  Bottom Layer w0.15: C90.1@44.37,11.05 44.37,11.45 46.59,11.45 ; C92.1@46.2,14.45 v1(46.4,13.9) ; v1(46.4,11.9) C89.1@46.59,11.05 ; C91.1@48.81,11.05 47.9,11.05 47.5,11.45 46.59,11.45 ; C89.1@46.59,11.05 46.59,11.45 ; C89.1@46.59,11.05 46.59,11.45
  Bottom Layer w0.16: v1(46.4,11.9) 46.75,11.5
  Bottom Layer w0.175: 49.18,10.707 49.7,10.707
  Bottom Layer w0.2: X2.20@1.27,24.13 1.27,23.05 15.3,23.05 15.3,15.6 L3.2@15.851,14.465 ; C87.1@43.45,22.4 44.3,22.4 44.3,19.8 ; 43.6,15.935 43.56,18.6 44.3,19.3 44.3,19.8 ; C88.1@46.55,22.4 47.4,22.4 47.4,19.8 44.3,19.8
  Bottom Layer w0.205: 46.75,11.5 47.6,11.5
  Bottom Layer w0.21: 48.95,10.84 49.18,10.707
  Bottom Layer w0.235: 49.7,10.707 50.23,10.85
  Bottom Layer w0.25: 50.23,10.85 50.6,10.2 51,9.45 v1(51.9,9.445)
  Bottom Layer w0.3: v1(46.4,9.9) 46.25,10.3 46.25,11.3 46.59,11.45 ; 48.4,10.93 C91.1@48.81,11.05 48.95,10.84
  Bottom Layer w0.345: 47.95,10.95 48.4,10.93
  Bottom Layer w0.35: v1(46.4,9.9) v1(46.9,9.9)
  Bottom Layer w0.4: U7.4@13.85,14.24 C84.2@13.85,15.542
  Bottom Layer w0.47: 47.6,11.5 47.95,10.95
  Bottom Layer w0.96: 41.5,17.3 42,17
  Bottom Layer w1: C84.2@13.85,15.542 L3.2@15.851,14.465
  Bottom Layer w1.04: 40.9,17.3 41.5,17.3
  Bottom Layer w1.06: 50.23,10.85 50.23,15.3
  Bottom Layer w1.095: 42,17 42.8,16
  Bottom Layer w1.14: 48.3,15.935 49.6,15.935
  Bottom Layer w1.15: 49.6,15.935 50.23,15.3
  Bottom Layer w1.16: 37.85,15.85 39.6,15.85
  Bottom Layer w1.2: 43.6,15.935 48.3,15.935
  Bottom Layer w1.355: 39.6,15.85 40.9,17.3
  Bottom Layer w1.425: 36.6,14.49 37.85,15.85
  Bottom Layer w1.5: L3.2@15.851,14.465 36.6,14.49 ; 42.8,16 43.6,15.935
VCC1V8: C82.2 C93.1 C94.1 C95.1 C96.1 C144.1 L2.2 L7.1 U1.C9 U1.H13 U1.J13 U6.4 X2.19 | length 137.2
  Top Layer w0.15: v1(45.4,14.9) U1.C9@45.9,15.4 ; U1.H13@47.9,12.9 v1(48.4,13.4) ; C144.1@54.8,9.15 54.8,10 v1(58.3,10)
  Top Layer w0.2: U1.J13@47.9,12.4 U1.H13@47.9,12.9
  Top Layer w0.3: v1(51.95,15.75) C93.1@53,15.749
  L3-SIG w0.15: v1(43.9,14.4) 45.4,14.4 v1(45.4,14.9)
  L3-SIG w0.2: 45.4,14.4 48.4,14.4 v1(48.4,13.4) ; v1(50.5,19.4) 51.3,18.6 51.95,17 v1(51.95,15.75)
  L3-SIG w0.3: v1(1.1,9.3) 0.5,9.9 0.5,23.05 6.35,23.05 15.3,23.05 15.3,17.5 ; 3.81,23.05 X2.19@3.81,24.13
  L3-SIG w0.4: 44,21.75 44,16.2 45.4,15.5 v1(45.4,14.9) ; 49.95,21.75 50.5,21.2 v1(50.5,19.4)
  L3-SIG w0.6: 39.3,17.5 40.5,18.4 40.5,21.75 44,21.75 49.95,21.75
  L3-SIG w0.8: 15.3,17.5 39.3,17.5
  L4-SIG w0.4: v1(50.8,2.3) 50.8,2.9 55.7,2.9 55.7,10 ; v1(51.95,15.75) 55.7,15.75 55.7,10 ; v1(58.3,10) 55.7,10
  Bottom Layer w0.15: v1(43.9,14.4) C96.1@44.37,14.45 ; v1(48.4,13.4) 48.4,13.9 C95.1@48.81,14.45
  Bottom Layer w0.2: C94.1@49.65,22.4 50.5,22.4 v1(50.5,19.4)
  Bottom Layer w0.3: v1(50.8,2.3) L7.1@50.85,3.05
  Bottom Layer w0.4: v1(1.1,9.3) L2.2@1.452,8.135 ; C82.2@3.454,7.058 U6.4@3.454,8.36
  Bottom Layer w0.8: L2.2@1.452,8.135 C82.2@3.454,7.058
VCC3V3: BTN.1 BTN.2 C3.2 C4.2 C5.2 C6.2 C7.2 C8.2 C9.2 C11.2 C12.2 C13.2 C38.2 C80.2 C97.1 C98.1 C99.1 C100.1 C101.1 C102.1 C103.1 C104.1 C105.1 C106.1 C107.1 C108.1 C109.1 C110.1 C111.1 C112.1 C113.1 C114.1 C115.1 C116.1 C117.1 C118.1 C119.1 C120.1 C121.1 C122.1 C133.2 C134.2 C135.2 C136.2 C137.2 C138.2 C145.1 C146.1 C155.2 C156.2 C157.2 C158.2 C159.2 J1.6 J1.12 JP4.3 L1.2 L4.2 L5.2 LD5.A Q1.1 Q1.4 R1.3 R1.4 R2.2 R4.8 R6.2 R7.2 R19.2 R20.2 R23.1 R34.5 R34.6 R34.7 R34.8 R35.2 R80.1 R81.1 R82.1 R90.2 R91.2 R92.2 R93.2 R94.2 R96.2 R97.2 R98.2 R99.2 U1.B19 U1.C14 U1.C18 U1.F17 U1.G12 U1.G13 U1.H3 U1.J7 U1.K1 U1.K7 U1.K12 U1.K13 U1.L7 U1.L12 U1.L13 U1.M7 U1.M8 U1.M12 U1.M17 U1.N7 U1.N8 U1.R1 U1.R17 U1.U13 U1.V1 U1.V6 U1.V9 U1.V11 U2.20 U2.31 U2.42 U2.50 U2.56 U3.1 U3.3 U3.9 U3.14 U3.27 U3.43 U3.49 U4.8 U5.4 U10.8 X2.18 X3.4 | length 165.1
  Top Layer w0.076: v1(44.15,6.9) 44.15,7.65 U1.V6@44.4,7.9 ; v1(45.65,6.9) 45.65,7.65 U1.V9@45.9,7.9 ; v1(46.65,6.9) 46.65,7.65 U1.V11@46.9,7.9
  Top Layer w0.08: v1(59.42,20.34) R4.8@60.15,20.978
  Top Layer w0.145: 27.93,6.5 27.93,6.963 29.225,6.963 ; U2.20@29.225,7.2 29.225,6.963 ; U2.31@34.725,7.2 34.725,6.963 29.225,6.963 ; U4.8@51.15,21.305 v1(52.18,20.32)
  Top Layer w0.15: U1.H3@42.9,12.9 v1(43.4,13.4) ; v1(47.9,14.9) U1.C14@48.4,15.4 ; v1(48.9,10.4) 49.4,10.9
  Top Layer w0.2: BTN.2@18.725,14.995 v1(19.22,13.44) ; LD5.A@22.55,14.985 v1(23.26,15.5) ; 31.725,18.28 U2.56@31.725,19.3 ; v1(36.12,13.3) 36.12,14.35 U2.42@37.175,14.35 ; v1(39.52,20.84) Q1.1@40.45,20.85 ; v1(40.4,9.4) U1.R1@41.9,9.4 ; v1(40.9,7.9) U1.V1@41.9,7.9 ; v1(40.9,11.9) U1.K1@41.9,11.9 ; v1(42.14,19.88) Q1.4@42.15,20.85 ; v1(44.4,11.9) U1.K7@44.9,11.9 U1.L7@44.9,11.4 ; v1(44.4,12.4) U1.J7@44.9,12.4 ; v1(44.9,9.9) U1.N7@44.9,10.4 U1.M7@44.9,10.9 ; v1(45.4,9.9) U1.N8@45.4,10.4 U1.M8@45.4,10.9 ; U1.M12@47.4,10.9 U1.L12@47.4,11.4 U1.L13@47.9,11.4 U1.K13@47.9,11.9 ; U1.K12@47.4,11.9 U1.K13@47.9,11.9 ; U1.G12@47.4,13.4 v1(47.4,13.9) ; U1.U13@47.9,8.4 v1(47.9,8.9) ; U1.G13@47.9,13.4 v1(47.9,13.9) ; v1(48.4,11.9) U1.K13@47.9,11.9 ; v1(49.4,9.4) U1.R17@49.9,9.4 ; 49.4,10.9 U1.M17@49.9,10.9 ; v1(49.4,13.9) U1.F17@49.9,13.9 ; U1.C18@50.4,15.4 U1.B19@50.9,15.9 v1(51.4,15.9) ; C97.1@54.8,15.749 C98.1@56.6,15.749 v1(57.675,15.749) ; C145.1@56.6,9.15 v1(57.62,9.14)
  Top Layer w0.25: v1(30.3,16.4) 30.3,17.35 31.725,18.28 34.725,18.28
  Top Layer w0.28: U2.20@29.225,7.2 U2.20@29.225,7.9 ; U2.31@34.725,7.2 U2.31@34.725,7.9 ; 34.725,18.28 U2.50@34.725,19.3
  Top Layer w0.3: v1(17.675,16.2) C158.2@18.1,16.35 ; v3(18.47,10.45) BTN.1@18.725,10.845 ; v1(22.575,7.5) C159.2@23,7.5 ; C155.2@25.7,20.25 v1(25.7,20.675) ; v1(27.93,4.85) 27.93,6.5 ; C157.2@38.75,18 v1(38.825,18.425) ; v1(51.95,12.45) C146.1@53,12.45
  Top Layer w0.46: v1(12.3,12.275) v1(13,12.375)
  Top Layer w0.5: v1(13,12.375) X3.4@14.15,12.375
  Bottom Layer w0.2: v1(3.433,20.4) C13.2@3.45,21.44 ; v1(5.233,20.4) C11.2@5.95,21.39 ; v1(7.62,21.38) C12.2@8.25,21.39 ; v1(9.92,21.38) R35.2@10.55,21.39 ; v1(10.1,18.38) R34.8@10.62,18.39 ; R34.7@11.42,18.39 v1(12.22,17.66) ; R34.6@12.22,18.39 v1(12.22,17.66) ; R34.5@13.02,18.39 v1(12.22,17.66) ; U3.27@17.95,6.17 v1(16.95,6) C9.2@19.05,4.25 ; R97.2@18.15,19.35 v1(18.925,20.1) ; v1(19.34,2.32) L4.2@19.45,3.05 ; R19.2@19.35,18.75 v1(18.925,20.1) ; R98.2@19.35,19.35 v1(18.925,20.1) ; R96.2@20.55,18.75 v1(20.98,18.74) ; L5.2@22.25,3.05 v1(22.64,2.12) C133.2@22.75,3.95 ; v1(23.94,2.32) C134.2@23.95,3.95 ; C135.2@25.15,3.95 25.15,4.85 26.35,4.85 ; C136.2@26.35,3.95 26.35,4.85 ; C3.2@26.95,3.05 v1(27.93,4.85) ; U10.8@27.215,18.695 v1(27.22,19.22) R80.1@28.9,19.05 ; C137.2@27.55,3.95 v1(27.93,4.85) ; U3.14@28.35,6.17 v1(27.93,4.85) ; C138.2@28.75,3.95 C4.2@29.25,3.05 ; 28.75,4.85 v1(27.93,4.85) ; U3.43@29.95,17.53 v1(30.3,16.4) ; C5.2@31.55,3.05 v1(32.175,1.025) ; U3.9@32.35,6.17 32.5,5.1 33.549,5.1 C38.2@33.549,3.95 v1(32.625,1) ; C6.2@33.85,3.05 33.85,1.54 v1(34.18,1.54) ; U3.49@34.75,17.53 v1(35.26,16.38) ; v1(36.14,1.98) C7.2@36.15,3.05 ; U3.3@37.15,6.17 v1(37.2,7.04) ; v1(38.44,3.78) C8.2@38.45,3.05 ; U3.1@38.75,6.17 v1(39.75,6.45) ; C100.1@40.35,21.1 v1(39.4,21.75) C106.1@40.35,22.4 ; v1(40.9,11.9) C108.1@42.15,11.05 ; C120.1@42.15,17.85 v1(42.14,19.88) C101.1@43.45,21.1 ; 42.4,8.4 43.2,8.2 44.37,8.2 46.59,8.2 C107.1@46.59,7.65 v1(46.65,6.9) ; C117.1@44.37,17.85 v1(44.875,19.05) ; C102.1@46.55,21.1 v1(46.55,20.25) ; C116.1@46.59,17.85 v1(46.59,19.4) ; v1(47.9,8.9) C110.1@48.81,7.65 ; v1(48.38,17.84) C118.1@48.81,17.85 ; C115.1@51.03,7.65 v1(51.42,6.54) 52.3,7.65 C122.1@53.25,7.65 ; C111.1@51.03,11.05 51.03,11.85 v1(51.85,11.85) ; C114.1@51.03,14.45 51.03,15.9 v1(51.4,15.9) ; v1(52.575,4.625) R20.2@52.95,3.95 ; C104.1@52.749,21.1 v1(53.54,21.74) C99.1@52.749,22.4 ; C119.1@53.25,11.05 52.6,11.05 v1(51.95,12.45) 53.25,13.2 C121.1@53.25,14.45 ; v1(54.74,4.62) R23.1@54.75,3.95 ; R2.2@56.049,22.05 v1(56.7,21.1) ; v1(57.24,22.48) R6.2@57.249,22.05 ; R1.4@57.8,2.85 v1(58.2,3.5) R1.3@58.6,2.85 ; v1(59.34,16.58) R91.2@59.35,17.01 ; R94.2@59.35,19.85 v1(59.42,20.34) ; R92.2@61.4,17.01 v1(61.82,17) ; R99.2@61.4,19.85 v1(61.82,19.84) ; v1(63.44,13.74) R90.2@63.45,14.17 ; v1(63.44,16.58) R93.2@63.45,17.01 ; 26.35,4.85 v1(27.93,4.85)
  Bottom Layer w0.23: U3.43@29.95,17.53 29.95,18.365 31.2,18.365 ; 33.5,18.365 34.75,18.365 U3.49@34.75,17.53
  Bottom Layer w0.24: C113.1@42.15,7.65 42.4,8.4
  Bottom Layer w0.25: v1(40.85,15.6) 40.85,14.9 41.4,14.9 41.9,14.7 C112.1@42.15,14.45
  Bottom Layer w0.29: 31.2,18.365 R81.1@31.2,19.05 ; 33.5,18.365 R82.1@33.5,19.05
  Bottom Layer w0.3: C138.2@28.75,3.95 28.75,4.85 ; v1(28.925,20.375) C156.2@29.25,20 ; C109.1@44.37,7.65 44.37,8.2 ; v1(49.65,20.3) C103.1@49.65,21.1 ; C105.1@55.849,21.1 v1(56.7,21.1) ; R7.2@58.449,22.05 v1(58.45,22.55)
  Bottom Layer w0.4: C80.2@3.906,16.652 U5.4@5.458,16.752
  Bottom Layer w1: v1(2.625,16.125) C80.2@3.906,16.652 ; v1(2.625,17.15) C80.2@3.906,16.652 ; v1(2.875,16.65) C80.2@3.906,16.652 ; L1.2@5.233,18.754 C80.2@3.906,16.652
  other v2: 18.47,10.45
  other v4: 18.47,10.45
  other v5: 18.47,10.45
VCCADC: C123.1 C124.1 L7.2 U1.C13 | length 24.5
  Top Layer w0.15: v1(47.4,14.9) U1.C13@47.9,15.4
  L3-SIG w0.2: v1(47.8,5.25) 47.8,3.9 53.34,3.9 v1(53.34,2.3)
  L4-SIG w0.2: v1(47.4,14.9) 47.4,14.47 47.03,14.1 47.03,12.97 48,12 48,11.13 48.53,10.6 48.53,8.35 48.63,8.25 48.63,5.42 48.8,5.25 48.8,4.85 48.55,4.6 47.8,4.6 v1(47.8,5.25)
  Bottom Layer w0.3: v1(47.4,14.9) C123.1@47.45,14.45 ; v1(47.8,5.25) C124.1@47.95,4.25 ; L7.2@52.45,3.05 v1(53.34,2.3)
VU: C78.2 C147.2 C148.2 C149.2 R107.2 R108.2 U5.1 U5.3 U6.1 U6.3 U7.1 U7.3 U8.5 U8.10 U8.11 X2.22 | length 102.1
  Top Layer w0.4: v1(12,11) 12.155,11 v1(12.44,11)
  Top Layer w0.55: 15.58,4.949 16.06,4.949
  Top Layer w0.6: 42.2,2.85 42.7,2.53 46.9,2.53 47.6,3.2
  Top Layer w0.7: 15.29,4.949 15.58,4.949 ; 16.06,4.949 16.35,4.949 ; 27.3,4.1 27.6,3.3 30.35,3.3 30.35,6.4 34.45,6.4 34.45,3.366 34.9,2.85
  Top Layer w1: v1@12.155,11 12.155,5.6 13.2,4.949 ; 14.96,4.949 15.29,4.949 ; 16.35,4.949 16.69,4.949
  Top Layer w1.2: 34.9,2.85 42.2,2.85 ; 47.6,3.2 48.2,3.6
  Top Layer w1.4: 25.6,4.949 27.3,4.1
  Top Layer w1.5: 13.2,4.949 14.96,4.949 ; 16.69,4.949 25.6,4.949 ; 48.2,3.6 56,3.6 X2.22@57.15,1.27
  Bottom Layer w0.2: U5.3@5.458,14.252 5.458,11.65 7.555,11.65 C148.2@7.555,10.95 ; U6.3@5.954,8.36 8.6,8.36 ; C149.2@9.748,11.65 8.75,11.65 8.75,14.24 U7.3@11.35,14.24
  Bottom Layer w0.24: 9.5,5.15 U8.5@10.1,5.15 ; U8.10@11.25,7.3 11.5,7.3 U8.11@11.75,7.3
  Bottom Layer w0.3: R108.2@6.5,6.45 R107.2@7.85,6.45 8.6,6.45 ; 8.6,10.95 8.6,8.36 8.6,6.45 ; 9.5,5.15 8.6,5.15 8.6,6.45
  Bottom Layer w0.5: 11.5,7.3 C78.2@11.5,8.651
  Bottom Layer w0.6: 11.5,10.05 v1(12,11) v1(12.44,11)
  Bottom Layer w0.8: U6.1@5.954,10.26 C148.2@7.555,10.95 8.6,10.95 10.25,10.5 C147.2@8.048,12.651 U5.1@7.358,14.252 ; C149.2@9.748,11.65 U7.1@11.35,12.34
  Bottom Layer w1: C149.2@9.748,11.65 10.25,10.5 11.5,10.05 C78.2@11.5,8.651
WE#: U1.V4 U3.16 | length 20.5
  Top Layer w0.076: v1(41.9,4.4) 43.15,6.55 43.15,7.187 43.15,7.65 U1.V4@43.4,7.9
  L3-SIG w0.125: v1(27.15,6.975) 27.15,6.725 28.35,5.525 38.625,5 39.95,4.725 40.175,4.525 41.55,4.3 v1(41.9,4.4)
  Bottom Layer w0.125: U3.16@26.75,6.17 v1(27.15,6.975)
pads on no net: U1.A2 U1.A8 U1.A10 U1.B2 U1.B8 U1.B10 U1.D1 U1.D2 U2.3 U2.23 U2.24 U2.26 U2.27 U2.28 U2.29 U2.30 U2.32 U2.33 U2.34 U2.36 U2.44 U2.45 U2.46 U2.48 U2.52 U2.53 U2.54 U2.55 U2.57 U2.58 U2.59 U3.40 U10.6 U10.7 X1.4 X3.A X3.B X4.MP1 X4.MP2

## Polygon pours and split planes (outlines as drawn)
GND on L2-GND "L2_GND_PLANE" (solid, remove dead copper, pour order 0): 0.25,0.25 69.6,0.25 69.6,25.15 0.25,25.15
VCC3V3 on L5-VCC3V3 "L5_VCC3V3_PLANE" (solid, remove dead copper, pour order 1): 0.25,0.25 69.6,0.25 69.6,25.15 0.25,25.15

## Keep-outs
Top Layer:
  rectangle: 3.075,10.525 5.075,13.025
  rectangle: 7.275,7.575 9.275,16.075

## Silkscreen, mask and mechanical layers (free items; w line width, h text height)
Top Overlay:
  text "20" at 0.73,22.189 h0.8
  text "19" at 3.27,22.189 h0.8
  text "18" at 5.81,22.189 h0.8
  text "17" at 8.35,22.189 h0.8
  text "16" at 10.89,22.189 h0.8
  text "15" at 13.43,22.189 h0.8
  text "14" at 15.97,22.189 h0.8
  text "13" at 18.51,22.189 h0.8
  text "12" at 21.05,22.189 h0.8
  text "11" at 23.59,22.189 h0.8
  text "10" at 26.13,22.189 h0.8
  text "3" at 54.343,22.189 h0.8
  text "1V0" at 0.33,20.939 h0.8
  text "1V8" at 2.87,20.939 h0.8
  text "3V3" at 5.41,20.939 h0.8
  text "GND" at 7.95,20.939 h0.8
  text "C13" at 10.49,20.939 h0.8
  text "C12" at 13.03,20.939 h0.8
  text "C11" at 15.57,20.939 h0.8
  text "C10" at 18.11,20.939 h0.8
  text "C9" at 21.05,20.939 h0.8
  text "C8" at 23.59,20.939 h0.8
  text "C7" at 26.13,20.939 h0.8
  text "C0" at 53.943,20.939 h0.8
  text "2 CLK" at 57.55,19.255 h0.8 r90
  text "ZULU A7" at 37.5,5 h1.6
  text "AI1" at 0.33,3.661 h0.8
  text "AI0" at 2.87,3.661 h0.8
  text "C28" at 5.41,3.661 h0.8
  text "C27" at 7.95,3.661 h0.8
  text "C26" at 10.49,3.661 h0.8
  text "C25" at 13.03,3.661 h0.8
  text "C24" at 15.57,3.661 h0.8
  text "C23" at 18.11,3.661 h0.8
  text "C22" at 20.65,3.661 h0.8
  text "C21" at 23.19,3.661 h0.8
  text "C19" at 38.303,3.661 h0.8
  text "C18" at 40.843,3.661 h0.8
  text "C17" at 43.383,3.661 h0.8
  text "C16" at 45.923,3.661 h0.8
  text "C15" at 48.463,3.661 h0.8
  text "C14" at 51.003,3.661 h0.8
  text "RST" at 53.543,3.661 h0.8
  text "VU" at 56.483,3.661 h0.8
  text "40" at 0.73,2.411 h0.8
  text "39" at 3.27,2.411 h0.8
  text "38" at 5.81,2.411 h0.8
  text "37" at 8.35,2.411 h0.8
  text "36" at 10.89,2.411 h0.8
  text "35" at 13.43,2.411 h0.8
  text "34" at 15.97,2.411 h0.8
  text "33" at 18.51,2.411 h0.8
  text "32" at 21.05,2.411 h0.8
  text "31" at 23.59,2.411 h0.8
  text "30 C20" at 27.07,2.411 h0.8 r90
  text "29" at 38.703,2.411 h0.8
  text "28" at 41.243,2.411 h0.8
  text "27" at 43.783,2.411 h0.8
  text "26" at 46.323,2.411 h0.8
  text "25" at 48.863,2.411 h0.8
  text "24" at 51.403,2.411 h0.8
  text "23" at 53.943,2.411 h0.8
  text "22" at 56.483,2.411 h0.8
  text "21 GND" at 60.09,2.411 h0.8 r90
Mechanical 1:
  the board outline again, w0.1